# Altium PCB Temp_sense_Project 2.0 - leviathan.PcbDoc (part 3 of 3)
Units mm, origin at the board's own origin, x right, y up, seen from the top; angles counter-clockwise.
Board outline 238.51 x 89.79 mm, 4 copper layers (Top Layer, Layer 1, Layer 2, Bottom Layer), stack 0.603 mm thick; 185 components, 160 nets, 943 pads, 253 vias.
Unrouted connection lines stored in the file: 15.
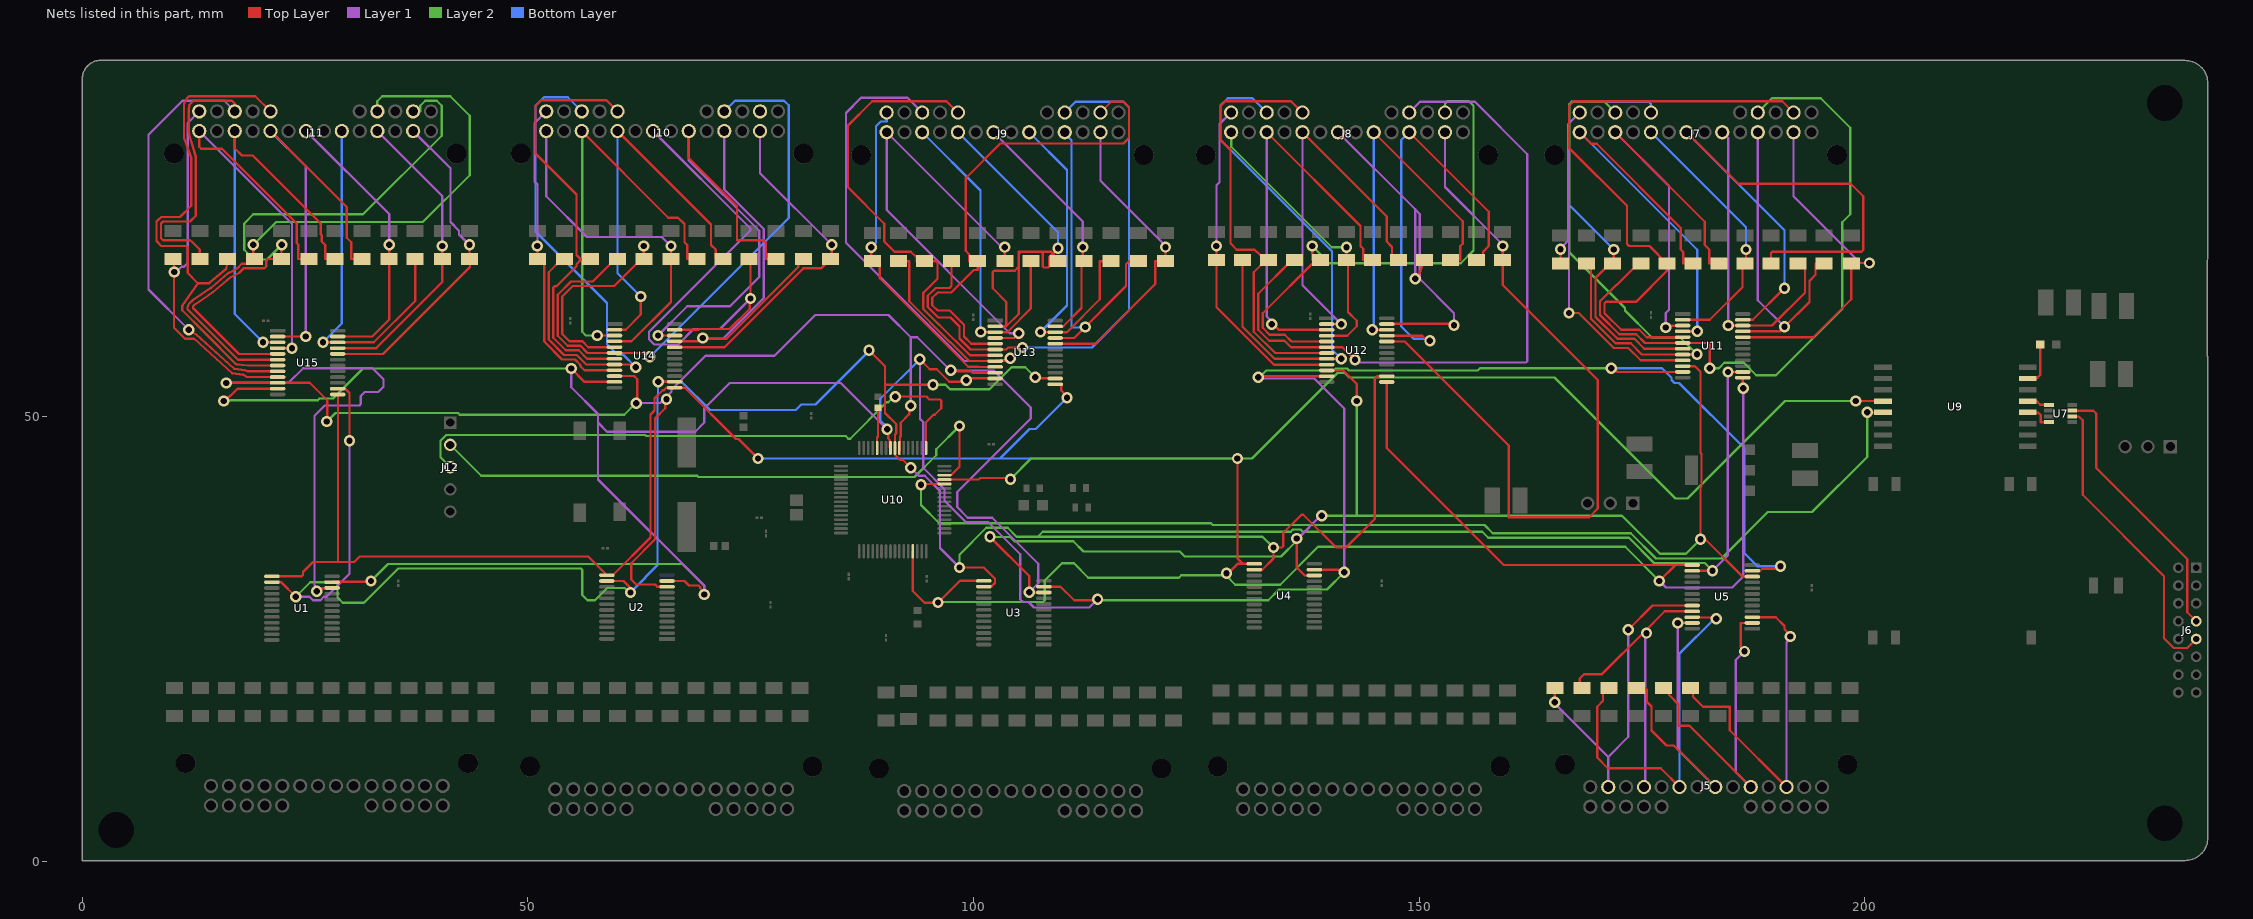
[diagram p5: the nets of this part, all layers, seen from the top]

## Via types
v1: diameter 1.27, hole 0.711, Top Layer to Bottom Layer, 247 vias
v2: diameter 0.711, hole 0.711, Top Layer to Bottom Layer, 6 vias

## Nets (pads, with @x,y where several pads share a name; then routed paths per layer and width w, separated by ;. In a path a pad name is that pad's centre, name@x,y a point inside that pad or via, vN(x,y) a via of type N, cw(c..) or ccw(c..) an arc to the next point about the centre after c; other vN are vias at no path point) (continued)
NetJ5_13: J5.13 R55.2 U5.3 | length 40
  Top Layer w0.254: R55.2@180.467,19.482 180.746,19.482 180.746,18.517 181.864,17.399 184.861,17.399 184.861,14.757 J5.13@191.237,8.382 ; U5.3@187.398,27.443 190.021,27.443 191.008,26.456 191.008,26.075 191.643,25.44 v1(191.643,25.273)
  Layer 1 w0.254: J5.13@191.237,8.382 191.237,24.592 191.643,24.998 v1(191.643,25.273)
NetJ5_15: J5.15 R56.2 U5.2 | length 37.2
  Top Layer w0.254: R56.2@177.419,19.482 178.047,19.482 178.047,18.72 179.121,17.646 179.121,15.265 180.34,15.265 J5.15@187.223,8.382 ; v1(186.512,23.597) 186.08,24.028 186.08,26.793 U5.2@187.398,26.793
  Layer 1 w0.254: v1(186.512,23.597) 185.547,22.631 185.547,10.058 J5.15@187.223,8.382
NetJ5_17: J5.17 R57.2 U5.23 | length 37.6
  Top Layer w0.254: R57.2@174.371,19.482 175.386,19.482 175.577,19.292 175.577,17.916 176.073,17.42 176.073,14.732 177.775,13.03 178.587,13.03 J5.17@183.236,8.382 ; v1(179.019,26.793) U5.23@180.648,26.793
  Layer 1 w0.254: v1(179.019,26.793) 179.019,12.598 J5.17@183.236,8.382
NetJ5_19: J5.19 R58.2 U5.22 | length 42.8
  Top Layer w0.254: R58.2@171.323,19.482 170.637,19.482 170.637,18.059 169.977,17.399 169.977,11.684 171.171,10.49 177.114,10.49 J5.19@179.222,8.382 ; U5.22@180.648,27.443 180.679,27.412 183.188,27.412 v1(183.331,27.269)
  Bottom Layer w0.254: J5.19@179.222,8.382 179.222,23.354 183.138,27.269 v1(183.331,27.269)
NetJ5_21: J5.21 R59.2 U5.21 | length 34.6
  Top Layer w0.254: R59.2@168.275,19.482 168.021,19.736 168.021,20.552 168.518,21.049 170.528,21.049 v1@175.235,25.756 ; v1(175.514,25.654) 175.336,25.654 v1@175.235,25.756 ; U5.21@180.648,28.093 177.572,28.093 v1@175.235,25.756
  Layer 1 w0.254: J5.21@175.235,8.382 175.374,8.522 175.374,25.514 v1(175.514,25.654)
NetJ5_23: J5.23 R60.2 U5.20 | length 37.1
  Top Layer w0.254: v1(165.227,17.898) R60.2@165.227,19.482 ; v1(173.482,26.035) 176.19,28.743 U5.20@180.648,28.743
  Layer 1 w0.254: v1(165.227,17.898) 165.227,17.755 171.221,11.76 ; J5.23@171.221,8.382 171.221,11.76 ; v1(173.482,26.035) 173.482,14.021 171.221,11.76
NetJ6_7: J6.7 U7.7 | length 30.8
  Top Layer w0.254: U7.7@223.296,50.617 225.659,50.617 225.984,50.292 225.984,44.171 236.195,33.96 236.195,27.996 J6.7@237.204,26.987
NetJ6_9: J6.9 U7.6 | length 34.1
  Top Layer w0.254: U7.6@223.296,49.967 224.028,49.967 224.46,49.535 224.46,41.173 233.604,32.029 233.604,25.07 234.696,23.978 236.195,23.978 J6.9@237.204,24.987
NetJ7_1: J7.1 R61.2 U11.9 | length 54.1
  Top Layer w0.254: R61.2@165.862,67.132 v1(165.862,68.716) ; v1(166.827,61.57) 167.919,61.57 171.831,57.658 173.482,57.658 174.879,56.261 U11.9@179.578,56.261
  Layer 1 w0.254: v1(165.862,68.716) 165.862,68.847 166.726,69.71 166.726,82.779 166.827,82.88 ; v1(166.827,61.57) 166.827,82.88 ; J7.1@168.021,84.074 166.827,82.88
NetJ7_3: J7.3 R62.2 U11.8 | length 61.6
  Top Layer w0.254: R62.2@168.783,67.132 169.291,66.624 169.291,60.916 172.041,58.166 173.736,58.166 174.991,56.911 U11.8@179.578,56.911 181.162,56.911 v1(181.183,56.932)
  Layer 2 w0.254: J7.3@172.009,84.074 170.815,85.268 167.132,85.268 166.84,84.976 166.84,76.479 166.878,76.441 166.878,68.358 173.097,62.139 173.097,61.852 176.098,58.852 179.263,58.852 v1(181.183,56.932)
NetJ7_5: J7.5 R63.2 U11.7 | length 48.6
  Top Layer w0.254: v1(171.831,68.707) 171.831,67.209 171.753,67.132 R63.2@171.704,67.132 171.429,67.132 169.799,65.502 169.799,61.127 172.252,58.674 174.161,58.674 175.274,57.561 U11.7@179.578,57.561
  Bottom Layer w0.254: v1(171.831,68.707) 166.827,73.711 166.827,84.963 167.132,85.268 175.768,85.268 176.022,85.014 J7.5@176.022,84.074
NetJ7_7: J7.7 R64.2 U11.6 | length 76.1
  Top Layer w0.254: R64.2@174.879,67.132 174.604,67.132 172.204,64.732 172.156,64.732 170.307,62.883 170.307,61.337 172.462,59.182 174.371,59.182 175.342,58.211 U11.6@179.578,58.211 182.477,58.211 182.626,58.062 v1(182.626,55.372)
  Layer 2 w0.254: v1(182.626,55.372) 182.636,55.382 183.642,55.382 184.237,55.977 186.456,55.977 187.838,54.595 190.057,54.595 197.485,62.023 197.485,71.753 198.374,72.642 198.374,82.372 195.072,85.674 189.611,85.674 J7.7@188.011,84.074
NetJ7_9: J7.9 R65.2 U11.5 | length 69.8
  Top Layer w0.254: U11.5@179.578,58.861 175.536,58.861 174.707,59.69 172.673,59.69 170.815,61.548 170.815,62.673 170.964,62.821 174.327,62.821 177.8,66.294 R65.2@177.8,67.132 175.844,69.088 173.558,69.088 173.317,69.329 173.317,73.596 166.827,80.086 166.827,84.836 167.335,85.344 190.754,85.344 J7.9@192.024,84.074
NetJ7_11: J7.11 R66.2 U11.4 | length 50.4
  Top Layer w0.254: J7.11@168.021,81.864 169.316,80.569 169.926,80.569 179.374,71.121 179.374,68.698 179.642,68.43 179.642,67.132 R66.2@180.721,67.132 ; U11.4@179.578,59.511 v1(181.204,59.512) v1(181.204,59.512)
  Bottom Layer w0.254: J7.11@168.021,81.864 181.204,68.682 v1(181.204,59.512)
NetJ7_13: J7.13 R67.2 U11.3 | length 46.8
  Top Layer w0.254: J7.13@172.009,81.864 182.067,71.806 182.067,69.194 182.563,68.698 182.563,67.132 R67.2@183.642,67.132 ; v1(177.673,59.944) 177.859,60.13 179.547,60.13 U11.3@179.578,60.161
  Layer 1 w0.254: J7.13@172.009,81.864 178.054,75.819 178.054,61.951 177.673,61.57 v1(177.673,59.944)
NetJ7_15: J7.15 R68.2 U11.2 | length 30.5
  Top Layer w0.254: U11.2@179.578,60.811 182.626,60.811 186.284,64.469 R68.2@186.284,67.132 ; R68.2@186.563,67.132 R68.2@186.284,67.132 ; v1(186.69,68.707) 186.69,67.538 R68.2@186.284,67.132
  Bottom Layer w0.254: J7.15@176.022,81.864 186.69,71.196 v1(186.69,68.707)
NetJ7_17: J7.17 R69.2 U11.23 | length 68.7
  Top Layer w0.254: J7.17@180.01,81.864 185.801,76.073 198.45,76.073 199.847,74.676 199.847,68.656 199.644,68.453 189.633,68.453 189.484,68.304 R69.2@189.484,67.132 ; U11.23@186.328,60.811 187.452,60.811 v1(191.008,64.367)
  Bottom Layer w0.254: J7.17@180.01,81.864 191.008,70.866 v1(191.008,64.367)
NetJ7_19: J7.19 R70.2 U11.22 | length 36.1
  Top Layer w0.254: v1(184.683,60.173) 184.695,60.161 U11.22@186.328,60.161 189.599,60.161 193.294,63.856 193.294,67.132 R70.2@192.532,67.132
  Layer 1 w0.254: J7.19@184.023,81.864 184.683,81.204 v1(184.683,60.173)
NetJ7_21: J7.21 R71.2 U11.21 | length 37.5
  Top Layer w0.254: U11.21@186.328,59.511 190.499,59.511 v1(191.008,60.02) 193.802,62.814 193.802,65.176 194.488,65.862 194.488,67.132 R71.2@195.453,67.132
  Layer 1 w0.254: J7.21@188.011,81.864 188.011,63.017 v1(191.008,60.02)
NetJ7_23: J7.23 R72.2 U11.20 | length 38.8
  Top Layer w0.254: U11.20@186.328,58.861 194.243,58.861 198.501,63.119 R72.2@198.501,67.132 198.552,67.183 v1(200.533,67.183)
  Layer 1 w0.254: J7.23@192.024,81.864 192.024,74.676 199.517,67.183 v1(200.533,67.183)
NetJ8_1: J8.1 R73.2 U12.9 | length 37.6
  Top Layer w0.254: v1(127.254,69.097) R73.2@127.254,67.513 127.254,62.23 133.705,55.779 U12.9@139.627,55.779
  Layer 1 w0.254: v1(127.254,69.097) 127.254,75.897 127.61,76.253 127.61,82.779 J8.1@128.905,84.074
NetJ8_3: J8.3 R74.2 U12.8 | length 60.3
  Top Layer w0.254: R74.2@130.175,67.513 130.175,60.035 133.781,56.429 U12.8@139.627,56.429 141.24,56.429 v1(141.249,56.439)
  Bottom Layer w0.254: J8.3@132.893,84.074 131.293,85.674 128.524,85.674 127.711,84.861 127.711,81.026 140.233,68.504 140.233,57.455 v1(141.249,56.439)
NetJ8_5: J8.5 R75.2 U12.7 | length 48.6
  Top Layer w0.254: R75.2@133.096,67.513 R75.2@132.817,67.513 ; J8.5@136.906,84.074 135.636,85.344 128.219,85.344 127.711,84.836 127.711,80.975 128.829,79.858 128.829,69.393 129.54,68.682 131.521,68.682 R75.2@132.817,67.513 ; U12.7@139.627,57.079 133.849,57.079 131.445,59.483 131.445,66.137 132.817,67.509 R75.2@132.817,67.513
NetJ8_7: J8.7 R76.2 U12.6 | length 80.8
  Top Layer w0.254: R76.2@136.017,67.513 135.742,67.513 131.953,63.724 131.953,59.694 133.185,58.462 134.883,58.462 135.616,57.729 U12.6@139.627,57.729 141.407,57.729 v1(142.799,56.337)
  Layer 1 w0.254: v1(142.799,56.337) 143.074,56.337 143.404,56.007 161.979,56.007 162.128,56.156 162.128,79.4 156.261,85.268 150.089,85.268 J8.7@148.895,84.074
NetJ8_9: J8.9 R77.2 U12.5 | length 60.7
  Top Layer w0.254: v1(137.998,69.088) 137.998,67.513 R77.2@138.429,67.513 ; R77.2@138.938,67.513 R77.2@138.429,67.513 ; U12.5@139.627,58.379 135.684,58.379 134.922,59.142 133.224,59.142 132.461,59.904 132.461,61.544 R77.2@138.429,67.513
  Layer 2 w0.254: v1(137.998,69.088) 139.929,67.158 154.686,67.158 156.108,68.58 156.108,84.836 155.6,85.344 153.162,85.344 152.908,85.09 J8.9@152.908,84.074
NetJ8_11: J8.11 R78.2 U12.4 | length 32.5
  Top Layer w0.254: U12.4@139.627,59.029 141.935,59.029 143.002,60.096 143.002,60.706 142.011,61.697 142.011,67.513 R78.2@141.859,67.513 v1(141.859,68.961)
  Layer 2 w0.254: J8.11@128.905,81.864 128.905,80.239 140.183,68.961 v1(141.859,68.961)
NetJ8_13: J8.13 R79.2 U12.3 | length 48.1
  Top Layer w0.254: J8.13@132.893,81.864 143.434,71.323 143.434,69.079 143.739,68.774 143.739,67.513 R79.2@144.78,67.513 ; v1(133.477,60.325) 133.622,60.325 134.268,59.679 U12.3@139.627,59.679
  Layer 1 w0.254: J8.13@132.893,81.864 132.893,61.178 133.477,60.593 v1(133.477,60.325)
NetJ8_15: J8.15 R80.2 U12.2 | length 44.2
  Top Layer w0.254: J8.15@136.906,81.864 146.355,72.415 146.355,69.596 146.964,68.986 146.964,67.513 R80.2@147.701,67.513 ; U12.2@139.627,60.329 v1(141.275,60.329)
  Layer 1 w0.254: J8.15@136.906,81.864 136.906,64.698 v1(141.275,60.329)
NetJ8_17: J8.17 R81.2 U12.23 | length 45
  Top Layer w0.254: U12.23@146.377,60.329 146.408,60.36 153.762,60.36 v1(153.924,60.198) ; v1(149.555,65.405) 149.784,65.405 R81.2@150.622,67.513
  Layer 1 w0.254: J8.17@140.894,81.864 149.555,73.203 ; v1(149.555,65.405) 149.555,73.203 ; v1(153.924,60.198) 153.924,61.544 150.063,65.405 150.063,72.695 149.555,73.203
NetJ8_19: J8.19 R82.2 U12.22 | length 43.6
  Top Layer w0.254: v1(144.729,59.69) 144.74,59.679 U12.22@146.377,59.679 ; J8.19@144.907,81.864 154.889,71.882 154.889,69.346 154.622,69.079 154.622,67.551 154.584,67.513 R82.2@153.543,67.513
  Bottom Layer w0.254: v1(144.729,59.69) 144.907,59.868 J8.19@144.907,81.864
NetJ8_21: J8.21 R83.2 U12.21 | length 50.1
  Top Layer w0.254: U12.21@146.377,59.029 150.358,59.029 150.937,58.45 v1(151.212,58.45) ; J8.21@148.895,81.864 157.81,72.949 157.81,69.079 157.161,68.43 157.161,67.513 R83.2@156.464,67.513
  Bottom Layer w0.254: J8.21@148.895,81.864 148.006,80.975 148.006,60.046 149.377,58.674 150.713,58.674 150.937,58.45 v1(151.212,58.45)
NetJ8_23: J8.23 R84.2 U12.20 | length 86.3
  Top Layer w0.254: U12.20@146.377,58.379 148.387,58.379 160.071,46.695 160.071,38.659 169.088,38.659 170.053,39.624 170.053,54.051 159.385,64.719 R84.2@159.385,67.513 v1(159.385,69.097)
  Layer 1 w0.254: J8.23@152.908,81.864 152.908,75.717 159.385,69.24 v1(159.385,69.097)
NetJ9_1: J9.1 R85.2 U13.9 | length 37.4
  Top Layer w0.254: v1(88.519,68.961) 88.519,67.386 R85.2@88.646,67.386 88.921,67.386 89.472,66.835 89.472,65.475 99.393,55.555 100.518,55.555 100.548,55.525 U13.9@102.416,55.525
  Bottom Layer w0.254: v1(88.519,68.961) 89.052,69.494 89.052,82.525 89.586,83.058 90.246,83.058 J9.1@90.246,84.074
NetJ9_3: J9.3 R86.2 U13.8 | length 68.6
  Top Layer w0.254: R86.2@91.567,67.386 92.773,67.386 92.773,62.893 97.369,58.297 97.409,58.297 99.531,56.175 U13.8@102.416,56.175 102.447,56.206 103.559,56.206 103.859,56.506 v1(104.134,56.506)
  Layer 1 w0.254: J9.3@94.234,84.074 92.583,85.725 87.376,85.725 85.674,84.023 85.674,69.469 98.968,56.175 102.991,56.175 103.127,56.311 103.939,56.311 v1(104.134,56.506)
NetJ9_5: J9.5 R87.2 U13.7 | length 52
  Top Layer w0.254: J9.5@98.247,84.074 96.977,85.344 88.646,85.344 85.903,82.601 85.903,75.692 89.992,71.603 89.992,69.596 91.135,68.453 92.964,68.453 93.599,67.818 93.599,67.386 94.615,67.386 95.809,67.386 95.958,67.237 95.958,65.429 94.361,63.831 94.361,62.023 96.119,60.265 96.159,60.265 99.599,56.825 U13.7@102.416,56.825
NetJ9_7: J9.7 R88.2 U13.6 | length 65.1
  Top Layer w0.254: R88.2@97.536,67.386 97.536,64.625 97.3,64.389 95.762,64.389 94.869,63.496 94.869,62.234 96.041,61.062 97.409,61.062 98.425,60.046 98.425,58.718 99.668,57.475 U13.6@102.416,57.475 103.666,57.475 103.9,57.709 v1(105.486,57.709)
  Bottom Layer w0.254: v1(105.486,57.709) 113.284,57.709 117.45,61.874 117.45,84.658 116.84,85.268 111.43,85.268 J9.7@110.236,84.074
NetJ9_9: J9.9 R89.2 U13.5 | length 55.8
  Top Layer w0.254: U13.5@102.416,58.125 99.736,58.125 98.933,58.928 98.933,60.256 97.34,61.849 95.972,61.849 95.377,62.444 95.377,63.286 95.972,63.881 97.511,63.881 97.917,64.287 100.025,66.396 100.457,66.396 R89.2@100.457,67.386 99.517,67.386 99.517,68.148 99.111,68.555 99.111,76.708 102.997,80.594 116.84,80.594 117.45,81.204 117.45,84.658 116.84,85.268 115.443,85.268 J9.9@114.249,84.074
NetJ9_11: J9.11 R90.2 U13.4 | length 52.4
  Top Layer w0.254: U13.4@102.416,58.775 104.571,58.775 v1(105.08,59.284) ; R90.2@103.505,67.386 v1(103.505,68.97)
  Layer 1 w0.254: v1(103.505,68.97) 103.311,69.164 102.946,69.164 J9.11@90.246,81.864 90.246,73.121 104.064,59.303 105.06,59.303 v1(105.08,59.284)
NetJ9_13: J9.13 R91.2 U13.3 | length 37.2
  Top Layer w0.254: v1(100.823,59.444) 100.832,59.434 102.407,59.434 U13.3@102.416,59.425 103.783,59.425 106.426,62.068 R91.2@106.426,67.386
  Bottom Layer w0.254: J9.13@94.234,81.864 100.787,75.311 100.787,59.479 v1(100.823,59.444)
NetJ9_15: J9.15 R92.2 U13.2 | length 52.1
  Top Layer w0.254: U13.2@102.416,60.075 103.611,60.075 ; R92.2@109.474,67.386 108.991,67.386 108.991,68.174 108.712,68.453 105.08,68.453 105.08,61.472 103.683,60.075 103.611,60.075 ; v1(109.474,68.834) 108.506,67.866 108.506,66.825 108.357,66.677 107.909,66.677 107.76,66.825 107.76,68.221 107.537,68.444 105.315,68.444 105.092,68.221 105.092,66.803 104.616,66.327 102.308,66.327 102.159,66.178 102.159,64.338 103.683,62.814 103.683,60.147 103.611,60.075
  Bottom Layer w0.254: J9.15@98.247,81.864 109.474,70.637 v1(109.474,68.834)
NetJ9_17: J9.17 R93.2 U13.23 | length 28
  Top Layer w0.254: U13.23@109.166,60.075 110.062,60.075 112.116,62.128 112.116,67.386 R93.2@112.395,67.386 112.268,67.513 v1(112.268,68.97)
  Layer 1 w0.254: J9.17@102.235,81.864 112.268,71.831 v1(112.268,68.97)
NetJ9_19: J9.19 R94.2 U13.22 | length 39.1
  Top Layer w0.254: v1(107.518,59.436) 107.529,59.425 U13.22@109.166,59.425 110.479,59.425 114.173,63.119 114.173,67.386 R94.2@115.443,67.386
  Bottom Layer w0.254: J9.19@106.248,81.864 110.49,77.622 110.49,62.408 v1(107.518,59.436)
NetJ9_21: J9.21 R95.2 U13.21 | length 38
  Top Layer w0.254: U13.21@109.166,58.775 111.302,58.775 117.119,64.592 117.119,67.056 117.449,67.386 R95.2@118.491,67.386
  Bottom Layer w0.254: J9.21@110.236,81.864 110.236,81.718 110.998,80.956 110.998,60.096 111.147,59.948 112.475,59.948 v1(112.529,60.002)
NetJ9_23: J9.23 R96.2 U13.20 | length 35.2
  Top Layer w0.254: U13.20@109.166,58.125 113.7,58.125 120.396,64.821 120.396,67.386 R96.2@121.539,67.386 v1(121.539,68.97)
  Layer 1 w0.254: J9.23@114.249,81.864 114.249,76.403 121.539,69.113 v1(121.539,68.97)
NetJ10_1: J10.1 R97.2 U14.9 | length 36
  Top Layer w0.254: v1(51.054,69.088) R97.2@51.054,67.64 51.265,67.64 51.816,67.089 51.816,58.376 53.827,56.365 55.262,56.365 55.857,55.77 55.857,55.618 56.331,55.144 U14.9@59.49,55.144
  Layer 1 w0.254: v1(51.054,69.088) 51.054,75.982 50.749,76.287 50.749,82.906 J10.1@52.045,84.201
NetJ10_3: J10.3 R98.2 U14.8 | length 61.6
  Top Layer w0.254: R98.2@54.102,67.64 53.827,67.64 52.324,66.137 52.324,58.587 54.038,56.873 55.472,56.873 56.551,55.794 U14.8@59.703,55.794 61.533,55.794 61.828,55.499 v1(62.103,55.499)
  Bottom Layer w0.254: J10.3@56.032,84.201 54.458,85.776 51.791,85.776 50.851,84.836 50.851,70.728 58.877,62.702 58.877,58.055 60.058,56.874 60.728,56.874 v1(62.103,55.499)
NetJ10_5: J10.5 R99.2 U14.7 | length 48.3
  Top Layer w0.254: R99.2@57.023,67.64 56.032,67.64 ; U14.7@59.49,56.444 56.62,56.444 55.683,57.381 54.248,57.381 52.832,58.797 52.832,64.414 52.981,64.563 53.195,64.563 55.448,66.816 55.448,67.056 55.956,67.564 56.032,67.64 ; J10.5@60.046,84.201 58.801,85.446 51.46,85.446 50.851,84.836 50.851,79.477 55.448,74.879 55.448,68.071 55.88,67.64 56.032,67.64
NetJ10_7: J10.7 R100.2 U14.6 | length 66.9
  Top Layer w0.254: R100.2@60.071,67.64 59.796,67.64 57.258,65.102 54.819,65.102 53.34,63.623 53.34,59.008 54.459,57.889 55.893,57.889 56.688,57.094 U14.6@59.703,57.094 62.971,57.094 63.403,56.662 v1(63.678,56.662)
  Bottom Layer w0.254: v1(63.678,56.662) 79.248,72.232 79.248,84.887 78.74,85.395 73.228,85.395 J10.7@72.034,84.201
NetJ10_9: J10.9 R101.2 U14.5 | length 22.8
  Top Layer w0.254: U14.5@59.49,57.744 56.757,57.744 56.104,58.397 54.669,58.397 53.848,59.218 53.848,63.413 55.029,64.594 59.671,64.594 62.717,67.64 R101.2@62.992,67.64 v1(62.992,69.088)
NetJ10_11: J10.11 R102.2 U14.4 | length 38.3
  Top Layer w0.254: U14.4@59.49,58.394 U14.4@59.703,58.394 61.62,58.394 66.04,62.814 R102.2@66.04,67.64 v1(66.04,69.088)
  Layer 1 w0.254: J10.11@52.045,81.991 52.045,74.67 56.61,70.104 65.024,70.104 v1(66.04,69.088)
NetJ10_13: J10.13 R103.2 U14.3 | length 47.1
  Top Layer w0.254: J10.13@56.032,81.991 65.748,72.276 66.84,72.276 67.564,71.552 67.564,69.524 67.882,69.206 67.882,67.64 R103.2@68.961,67.64 ; v1(57.785,59.055) 57.791,59.05 59.484,59.05 U14.3@59.49,59.044
  Layer 2 w0.254: J10.13@56.032,81.991 56.085,81.939 56.085,59.465 56.495,59.055 v1(57.785,59.055)
NetJ10_15: J10.15 R104.2 U14.2 | length 45.3
  Top Layer w0.254: U14.2@59.49,59.694 U14.2@59.703,59.694 60.96,59.694 62.662,61.396 v1(62.662,63.424) ; J10.15@60.046,81.991 70.536,71.501 70.536,69.206 71.056,68.686 71.056,67.64 R104.2@71.882,67.64
  Bottom Layer w0.254: J10.15@60.046,81.991 60.046,66.04 v1(62.662,63.424)
NetJ10_17: J10.17 R105.2 U14.23 | length 61.4
  Top Layer w0.254: U14.23@66.454,59.694 69.093,59.694 69.175,59.776 72.603,59.776 74.89,62.063 74.89,63.126 v1(74.97,63.206) ; R105.2@74.803,67.64 74.97,67.473 74.97,63.246 v1@74.95,63.226
  Layer 1 w0.254: J10.17@64.033,81.991 74.93,71.095 74.93,70.83 63.576,59.476 63.576,58.634 64.171,58.039 66.85,58.039 68.587,59.776 71.54,59.776 v1(74.97,63.206)
NetJ10_19: J10.19 R106.2 U14.22 | length 56.2
  Top Layer w0.254: v1(64.592,59.055) 64.603,59.044 U14.22@66.24,59.044 ; J10.19@68.047,81.991 68.047,78.969 73.457,73.558 73.457,69.723 76.456,69.723 76.708,69.471 76.708,67.64 R106.2@77.851,67.64
  Layer 1 w0.254: v1(64.592,59.055) 67.869,62.332 72.658,62.332 75.946,65.619 75.946,70.797 68.047,78.696 J10.19@68.047,81.991
NetJ10_21: J10.21 R107.2 U14.21 | length 47.9
  Top Layer w0.254: U14.21@66.454,58.394 69.041,58.394 69.407,58.76 v1(69.596,58.76) ; v1@69.596,58.674 72.263,58.674 80.319,66.73 80.319,67.089 80.869,67.64 R107.2@80.899,67.64
  Layer 1 w0.254: v1(69.596,58.76) 69.682,58.674 71.875,58.674 76.454,63.253 76.454,71.007 72.034,75.427 J10.21@72.034,81.991
NetJ10_23: J10.23 R108.2 U14.20 | length 39.3
  Top Layer w0.254: U14.20@66.454,57.744 72.051,57.744 80.888,66.581 82.888,66.581 R108.2@83.947,67.64 84.074,67.767 v1(84.074,69.224)
  Layer 1 w0.254: J10.23@76.048,81.991 76.048,77.267 84.074,69.24 v1(84.074,69.224)
NetJ11_1: J11.1 R109.2 U15.9 | length 40.9
  Top Layer w0.254: R109.2@10.16,67.64 10.287,67.089 v1(10.287,66.167) 10.287,59.904 10.361,59.83 11.517,58.674 12.531,58.674 16.826,54.808 18.024,54.651 18.451,54.382 U15.9@21.898,54.382
  Layer 1 w0.254: v1(10.287,66.167) 10.513,66.167 11.119,66.772 11.4,66.772 11.811,67.183 11.811,82.906 J11.1@13.106,84.201
NetJ11_3: J11.3 R110.2 U15.8 | length 77.9
  Top Layer w0.254: v1(11.938,59.69) 12.742,59.182 17.036,55.316 18.251,55.155 18.519,55.032 U15.8@21.898,55.032 ; R110.2@13.208,67.64 13.159,67.64 13.159,68.71 12.326,69.542 12.261,69.596 12.073,69.732 9.049,69.732 8.826,69.955 8.826,71.626 9.049,71.849 12.097,71.849 12.246,71.998 12.722,72.474 12.722,79.128 11.974,81.656 cw(c13.106,81.991) 11.938,81.819 cw(c13.106,81.991) 11.925,81.991 11.925,84.201 cw(c13.106,84.201) 11.931,84.312 11.931,84.314 11.987,84.91 12.471,85.395 16.789,85.395 17.094,85.09 J11.3@17.094,84.201
  Layer 1 w0.254: v1(11.938,59.69) 7.417,64.211 7.417,81.585 11.227,85.395 15.9,85.395 J11.3@17.094,84.201
NetJ11_5: J11.5 R111.2 U15.7 | length 59.3
  Top Layer w0.254: R111.2@16.256,67.64 16.214,67.089 16.176,66.598 16.103,66.525 14.303,64.983 14.232,64.922 12.954,64.922 ; J11.5@21.107,84.201 19.406,85.903 11.96,85.903 11.811,85.754 11.405,85.046 11.405,81.232 12.21,79.038 12.21,73.607 10.96,72.357 8.839,72.357 8.318,71.836 8.318,70.802 8.306,70.79 8.306,69.64 8.857,69.088 11.662,69.088 11.811,68.939 11.811,66.065 12.954,64.922 ; U15.7@21.898,55.682 18.526,55.682 17.247,55.824 13.635,59.435 11.2,61.871 11.2,62.383 11.245,62.448 12.954,64.922
NetJ11_7: J11.7 R112.2 U15.6 | length 70.6
  Top Layer w0.254: R112.2@19.177,67.64 v1(19.177,69.215) ; R112.2@19.304,67.64 18.478,67.089 17.875,67.089 17.367,66.581 16.412,66.078 16.327,66.032 14.442,64.414 12.339,62.98 11.986,62.627 11.91,62.518 11.799,62.2 11.799,61.99 17.457,56.332 U15.6@21.898,56.332
  Layer 2 w0.254: v1(19.177,69.215) 21.742,71.78 38.202,71.78 43.459,77.038 43.459,83.718 41.288,85.89 33.642,85.89 33.096,85.344 J11.7@33.096,84.201
NetJ11_9: J11.9 R113.2 U15.5 | length 67.8
  Top Layer w0.254: U15.5@21.898,56.982 17.567,56.982 12.475,62.074 12.418,62.131 12.418,62.341 12.567,62.49 14.157,63.567 14.631,63.906 16.57,65.55 16.594,65.57 17.577,66.073 18.085,66.581 20.415,66.581 20.638,66.804 20.638,67.491 20.787,67.64 R113.2@22.352,67.64 v1(22.352,69.215)
  Layer 2 w0.254: v1(22.352,69.215) 20.701,67.564 19.279,67.564 18.161,68.682 18.161,71.628 19.177,72.644 31.496,72.644 40.31,81.458 40.31,84.836 39.764,85.382 38.468,85.382 37.922,84.836 37.922,84.201 J11.9@37.109,84.201
NetJ11_11: J11.11 R114.2 U15.4 | length 51.8
  Top Layer w0.254: J11.11@13.106,81.991 13.106,80.239 13.335,80.01 15.672,80.01 24.054,71.628 24.054,69.418 24.206,69.266 24.206,67.64 R114.2@25.4,67.64 ; U15.4@21.898,57.632 v1(23.52,57.633)
  Layer 1 w0.254: J11.11@13.106,81.991 23.52,71.577 v1(23.52,57.633)
NetJ11_13: J11.13 R115.2 U15.3 | length 47
  Top Layer w0.254: J11.13@17.094,81.991 17.094,80.061 17.907,79.248 19.112,79.248 26.734,71.626 26.734,70.421 26.848,70.307 26.848,69.6 27.242,69.206 27.242,67.64 R115.2@28.321,67.64 ; v1(20.27,58.282) U15.3@21.898,58.282
  Bottom Layer w0.254: J11.13@17.094,81.991 17.094,61.457 v1(20.27,58.282)
NetJ11_15: J11.15 R116.2 U15.2 | length 47.2
  Top Layer w0.254: J11.15@21.107,81.991 21.133,81.991 29.667,73.457 29.667,70.01 30.163,69.514 30.163,67.64 R116.2@31.369,67.64 ; U15.2@21.898,58.932 v1(25.07,58.932)
  Layer 1 w0.254: J11.15@21.107,81.991 25.07,78.029 v1(25.07,58.932)
NetJ11_17: J11.17 R117.2 U15.23 | length 31.6
  Top Layer w0.254: U15.23@28.648,58.932 32.516,58.932 34.417,60.833 R117.2@34.417,67.64 v1(34.417,69.224)
  Layer 1 w0.254: J11.17@25.095,81.991 34.417,72.669 v1(34.417,69.224)
NetJ11_19: J11.19 R118.2 U15.22 | length 41.6
  Top Layer w0.254: v1(27,58.293) 27.011,58.282 32.704,58.282 37.338,62.916 R118.2@37.338,67.64
  Bottom Layer w0.254: v1(27,58.293) 29.108,60.401 J11.19@29.108,81.991
NetJ11_21: J11.21 R119.2 U15.21 | length 34.8
  Top Layer w0.254: U15.21@28.648,57.632 32.969,57.632 40.386,65.049 R119.2@40.386,67.64 v1(40.386,69.088)
  Layer 1 w0.254: J11.21@33.096,81.991 40.386,74.701 v1(40.386,69.088)
NetJ11_23: J11.23 R120.2 U15.20 | length 36.8
  Top Layer w0.254: U15.20@28.648,56.982 33.741,56.982 43.489,66.73 43.489,67.585 R120.2@43.434,67.64 v1(43.434,69.215)
  Layer 1 w0.254: J11.23@37.109,81.991 41.292,77.808 41.292,71.788 42.266,70.815 42.266,70.383 v1(43.434,69.215)
NetJ12_2: J12.2 U10.46 | length 68.1
  Top Layer w0.254: U10.46@96.726,43.384 96.735,43.393 97.489,43.393 98.425,44.329 v1(98.425,48.895)
  Layer 2 w0.254: J12.2@41.275,46.783 44.751,43.307 69.004,43.307 69.131,43.18 93.385,43.18 95.808,45.603 95.808,46.278 v1(98.425,48.895)
NetJ12_3: J12.3 U10.49 | length 68.3
  Top Layer w0.254: v1(91.218,52.19) 91.226,52.197 94.714,52.197 95.033,51.877 96.227,51.877 96.375,51.729 96.375,50.887 95.636,50.148 95.504,50.148 94.676,49.321 U10.49@94.676,46.434
  Layer 2 w0.254: J12.3@41.275,44.283 40.183,45.375 40.183,47.244 40.818,47.879 63.172,47.879 63.292,47.759 85.645,47.759 85.945,47.46 86.155,47.46 90.243,51.548 90.423,51.548 91.064,52.19 v1(91.218,52.19)
NetR121_2: R121.2 U10.60 | length 4.5
  Top Layer w0.254: U10.60@89.176,46.434 89.176,47.607 89.281,47.712 R121.2@89.281,50.936
NetR124_1: R124.1 U9.7 | length 5
  Top Layer w0.254: U9.7@218.307,54.229 219.318,54.229 219.699,54.61 R124.1@219.699,58.039
NetU1_10: U1.10 U2.10 U3.10 U4.10 U5.10 U10.55 U11.10 U12.10 U13.10 U14.10 U15.10 | length 382.7
  Top Layer w0.254: v1(16.129,53.721) 16.14,53.732 U15.10@21.898,53.732 25.516,53.732 27.466,51.782 27.466,49.437 v1(27.432,49.403) ; v1(26.284,30.353) 26.559,30.353 26.898,30.692 27.982,30.692 U1.10@28.013,30.723 ; U14.10@59.49,54.494 U14.10@59.703,54.494 61.905,54.494 62.264,54.136 62.264,51.57 v1(62.154,51.46) ; v1(65.55,51.899) 65.412,51.761 65.412,50.883 64.262,49.733 64.262,36.181 61.581,33.501 61.581,31.667 62.144,31.104 64.262,31.104 64.516,30.85 U2.10@65.605,30.85 ; U10.55@91.749,46.12 91.749,47.652 91.821,47.723 91.821,49.255 92.77,50.204 92.77,50.987 v1(92.964,51.181) ; v1(97.43,55.139) 97.522,55.047 99.7,55.047 99.872,54.875 U13.10@102.416,54.875 ; v1(101.854,36.449) 106.248,32.055 v1(106.248,30.226) U3.10@107.896,30.215 ; v1(136.271,36.271) v1@136.398,36.144 ; v1@136.398,36.271 v1@136.398,36.144 ; U4.10@138.249,32.12 137.16,32.12 136.271,33.009 136.271,36.017 v1@136.398,36.144 ; v1@138.938,38.811 v1(139.065,38.811) ; U12.10@139.627,55.129 141.489,55.129 143.002,53.616 v1(143.002,51.689) ; U11.10@179.578,55.611 180.95,55.611 181.57,54.991 181.57,45.88 181.7,45.75 181.7,42.134 181.57,42.004 v1(181.57,36.173) 182.114,36.173 186.294,31.993 U5.10@187.398,31.993
  Layer 1 w0.254: v1(16.129,53.721) 16.14,53.732 23.129,53.732 24.769,55.372 31.242,55.372 31.621,55.372 32.552,55.372 33.782,54.142 33.782,53.3 33.187,52.705 31.688,52.705 31.242,52.259 31.242,51.352 31.093,51.203 27.2,51.203 26.035,50.038 26.035,31.01 26.09,30.955 26.09,30.547 v1(26.284,30.353) ; v1(62.154,51.46) 64.836,51.46 65.303,51.928 v1@65.303,52.146 ; v1(65.55,51.899) v1@65.303,52.146 ; v1(92.964,51.181) 92.964,58.841 ; v1@97.43,55.118 102.275,55.118 106.426,50.967 106.426,49.737 98.171,41.482 98.171,39.798 99.361,38.608 102.097,38.608 107.264,33.441 107.264,31.242 v1(106.248,30.226) ; v1(97.43,55.139) 97.388,55.139 93.686,58.841 92.964,58.841 ; v1@136.398,36.271 v1@138.938,38.811 ; v1@65.303,52.146 65.522,52.146 66.112,52.736 66.112,52.954 69.926,56.769 77.655,56.769 82.227,61.341 90.464,61.341 92.964,58.841
  Layer 2 w0.254: v1(27.432,49.403) 28.393,50.364 42.133,50.364 42.332,50.165 60.811,50.165 62.107,51.46 v1(62.154,51.46) ; v1(101.854,36.449) 104.126,36.449 104.608,35.966 111.178,35.966 112.347,34.798 123.14,34.798 123.699,34.239 134.493,34.239 136.271,36.017 v1(136.271,36.271) ; v1(139.065,38.811) 143.002,38.811 ; v1(143.002,51.689) 143.002,38.811 ; v1(181.57,36.173) 179.941,34.544 177.038,34.544 172.771,38.811 143.002,38.811
NetU1_11: U1.11 U2.11 U3.11 U4.11 U5.11 U10.57 U11.11 U12.11 U13.11 U14.11 U15.11 | length 399.5
  Top Layer w0.254: v1(15.875,51.689) 16.002,51.689 17.395,53.082 U15.11@21.898,53.082 ; U1.11@28.013,31.373 28.044,31.404 32.293,31.404 v1(32.385,31.496) ; v1(54.841,55.349) 56.346,53.844 U14.11@59.49,53.844 ; U2.11@65.605,31.5 67.56,31.5 68.072,30.988 69.16,30.988 69.339,30.808 69.339,30.695 69.774,30.261 v1(69.774,29.986) ; v1(90.297,48.514) 90.414,48.397 90.414,47.498 90.603,47.309 90.603,46.482 U10.57@90.676,46.434 ; v1(93.98,56.388) 95.093,55.275 95.857,55.275 97.273,53.859 99.015,53.859 v1(99.187,54.031) ; v1@99.187,54.156 99.287,54.256 102.385,54.256 U13.11@102.416,54.225 ; U3.11@107.896,30.865 109.759,30.865 111.287,29.337 113.792,29.337 v1(113.919,29.464) ; v1(131.953,54.356) 132.076,54.479 U12.11@139.627,54.479 ; U4.11@138.249,32.77 141.322,32.77 v1(141.605,32.487) ; v1(171.577,55.372) 171.852,55.372 172.263,54.961 U11.11@179.578,54.961 ; U5.11@187.398,32.643 188.294,32.643 188.519,32.868 190.267,32.868 v1(190.551,33.151)
  Layer 1 w0.254: v1(54.841,55.349) 54.841,53.25 57.861,50.23 57.861,49.276 ; v1(69.774,29.986) 69.774,30.988 57.861,42.901 57.861,49.276 ; v1(90.297,48.514) 85.09,53.721 72.644,53.721 69.774,50.851 69.774,49.276 68.758,48.26 58.877,48.26 57.861,49.276 ; v1(93.98,56.388) 93.98,49.692 94.343,49.329 94.343,44.21 96.747,41.806 96.747,40.504 99.151,38.1 101.64,38.1 105.232,34.508 105.232,29.464 105.55,29.146 106.172,29.146 106.794,28.524 112.979,28.524 v1(113.919,29.464) ; v1(131.953,54.356) 132.08,54.229 138.238,54.229 141.605,50.862 v1(141.605,32.487)
  Layer 2 w0.254: v1(15.875,51.689) 15.977,51.791 26.416,51.791 26.594,51.968 28.118,51.968 31.498,55.349 v1(54.841,55.349) ; v1(32.385,31.496) 34.29,33.401 67.361,33.401 69.774,30.988 v1(69.774,29.986) ; v1(113.919,29.464) 114.046,29.337 133.071,29.337 134.27,30.536 139.654,30.536 v1(141.605,32.487) ; v1(131.953,54.356) 132.08,54.356 132.842,55.118 140.399,55.118 140.634,55.353 141.896,55.353 142.131,55.118 156.59,55.118 156.844,55.372 v1(171.577,55.372)
  Bottom Layer w0.254: v1(90.297,48.514) 90.297,48.789 89.535,49.551 89.535,51.943 v1(93.98,56.388) ; v1(171.577,55.372) 177.254,55.372 178.321,54.305 178.321,54.067 178.665,53.723 179.178,53.723 186.508,46.392 186.508,34.603 187.96,33.151 v1(190.551,33.151)
NetU1_13: U1.13 U2.13 U3.13 U4.13 U5.13 U10.29 U11.13 U12.13 U13.13 U14.13 U15.13 | length 363.6
  Top Layer w0.254: U1.13@21.263,32.023 24.611,32.023 24.76,32.172 24.76,32.514 25.873,33.627 28.677,33.627 ; U15.13@28.648,52.432 28.648,52.386 28.677,52.358 28.677,33.627 ; v1(75.819,45.237) 73.617,47.439 73.35,47.439 67.595,53.194 U14.13@66.454,53.194 65.528,53.194 65.249,52.915 65.129,52.915 64.186,51.972 64.186,50.622 63.754,50.19 63.754,36.392 59.512,32.15 U2.13@58.855,32.15 56.766,34.239 31.115,34.239 30.503,33.627 28.677,33.627 ; U10.29@93.176,34.834 93.176,30.369 94.488,29.058 95.987,29.058 v1(96.012,29.083) 96.044,29.083 98.476,31.515 U3.13@101.146,31.515 ; U13.13@109.166,53.575 109.774,53.575 109.848,53.501 109.848,52.865 110.49,52.224 v1(110.49,52.07) ; v1(128.379,32.351) 128.541,32.351 129.61,33.42 130.226,33.42 ; 129.61,45.237 129.61,34.036 130.226,33.42 ; U4.13@131.499,33.42 130.226,33.42 ; U12.13@146.377,53.829 146.355,53.829 146.355,46.431 159.493,33.293 178.759,33.293 ; v1(176.962,31.496) 178.759,33.293 ; U5.13@180.648,33.293 178.759,33.293 ; U11.13@186.328,54.311 186.328,53.194 v1(186.385,53.137)
  Layer 1 w0.254: v1(176.962,31.496) 177.698,30.759 185.141,30.759 186.385,32.004 v1(186.385,53.137)
  Layer 2 w0.254: v1(96.012,29.083) 96.063,29.134 107.801,29.134 108.001,29.333 108.001,31.551 109.927,33.477 111.263,33.477 112.863,31.877 123.046,31.877 123.3,32.131 v1@128.321,32.131 ; v1(128.379,32.351) 128.379,32.19 v1@128.321,32.131 ; v1@176.974,31.484 v1(176.962,31.496) 173.126,35.331 138.666,35.331 134.424,31.09 129.362,31.09 v1@128.321,32.131
  Bottom Layer w0.254: v1(75.819,45.237) 102.965,45.237 ; v1(110.49,52.07) 106.977,48.557 106.284,48.557 102.965,45.237 ; 129.61,45.237 102.965,45.237
NetU1_14: U1.14 U2.14 U3.14 U4.14 U5.14 U10.56 U11.14 U12.14 U13.14 U14.14 U15.14 | length 374.2
  Top Layer w0.254: U1.14@21.263,31.373 22.272,31.373 v1(23.927,29.718) ; U15.14@28.648,53.082 28.679,53.051 29.53,53.051 29.972,52.609 v1(29.972,47.244) ; U2.14@58.855,31.5 60.717,31.5 61.509,30.708 v1(61.509,30.2) ; v1(64.602,53.844) U14.14@66.24,53.844 ; v1(88.265,57.404) 90.068,55.601 90.068,53.529 ; v1(92.964,44.196) 92.06,45.1 91.757,45.1 91.185,45.671 91.185,46.425 U10.56@91.176,46.434 91.176,47.952 91.313,48.088 91.313,49.107 90.068,50.352 90.068,53.529 ; v1(95.454,53.523) 90.075,53.523 90.068,53.529 ; v1(98.425,33.02) 101.142,33.02 102.403,31.759 102.403,31.271 102.028,30.896 101.177,30.896 U3.14@101.146,30.865 ; v1(106.934,54.356) 107.034,54.256 109.135,54.256 U13.14@109.166,54.225 ; U4.14@131.499,32.77 132.389,32.77 133.655,34.036 v1(133.655,35.255) 134.598,35.255 134.747,35.404 134.747,36.902 136.792,38.947 137.002,38.947 140.694,35.255 141.808,35.255 145.009,38.456 145.009,54.2 145.288,54.479 U12.14@146.377,54.479 ; U5.14@180.648,32.643 v1(182.926,32.643) ; v1(184.658,54.961) U11.14@186.328,54.961
  Layer 1 w0.254: v1(23.927,29.718) 25.482,29.718 25.863,29.337 26.705,29.337 27.086,29.718 27.381,29.718 29.972,32.309 v1(29.972,47.244) ; v1(92.964,44.196) 93.853,43.307 94.528,43.307 96.239,41.596 96.239,35.206 v1(98.425,33.02) ; v1(182.926,32.643) 184.633,34.35 184.633,54.936 v1(184.658,54.961)
  Layer 2 w0.254: v1(23.927,29.718) 25.578,31.369 28.478,31.369 28.626,31.22 28.626,29.652 29.222,29.057 31.596,29.057 35.432,32.893 55.935,32.893 56.084,32.744 56.084,29.932 56.679,29.337 57.521,29.337 58.893,30.709 60.852,30.709 61.361,30.2 v1(61.509,30.2) ; v1(95.454,53.523) 96.845,53.523 97.353,53.015 101.783,53.015 102.387,53.619 102.391,53.619 104.271,55.499 105.791,55.499 v1(106.934,54.356) ; v1(98.425,33.02) 98.425,34.457 101.433,37.465 103.828,37.465 104.819,36.474 107.213,36.474 ; v1(133.655,35.255) 132.436,36.474 107.213,36.474 ; v1(182.926,32.643) 182.041,33.528 176.367,33.528 173.547,36.347 157.759,36.347 157.074,37.033 136.946,37.033 136.692,37.287 135.85,37.287 135.596,37.033 107.772,37.033 107.213,36.474
  Bottom Layer w0.254: v1(61.509,30.2) 63.188,31.878 63.188,31.952 64.534,33.299 64.534,52.32 64.602,52.388 v1(64.602,53.844) 67.263,53.844 70.412,50.695 80.044,50.695 80.657,51.308 82.26,51.308 88.265,57.313 v1(88.265,57.404)
NetU7_1: U7.1 U9.5 | length 2.6
  Top Layer w0.254: U9.5@218.307,51.689 219.278,51.689 219.7,51.267 U7.1@220.696,51.267
NetU7_4: U7.4 U9.4 | length 3.3
  Top Layer w0.254: U9.4@218.307,50.419 219.456,50.419 219.761,50.114 219.761,49.317 U7.4@220.696,49.317
NetU9_12: U9.12 U10.45 | length 120.3
  Top Layer w0.254: U10.45@97.155,42.885 100.577,42.885 100.745,43.053 104.013,43.053 v1(104.14,42.926) ; v1(199.009,51.689) U9.12@202.057,51.689
  Layer 2 w0.254: v1(104.14,42.926) 106.451,45.237 v1(129.61,45.237) 131.237,45.237 140.844,54.845 141.686,54.845 142.194,54.337 165.206,54.337 178.776,40.767 180.126,40.767 191.048,51.689 v1(199.009,51.689)
NetU9_13: U9.13 U10.44 | length 125
  Top Layer w0.254: v1(94.107,42.291) 94.191,42.375 96.718,42.375 U10.44@96.726,42.384 ; v1(200.304,50.419) U9.13@202.057,50.419
  Layer 2 w0.254: v1(94.107,42.291) 94.107,40.03 96.164,37.973 126.657,37.973 126.835,37.795 157.328,37.795 158.267,36.855 173.758,36.855 176.577,34.036 183.921,34.036 189.128,39.243 194.096,39.243 200.304,45.452 v1(200.304,50.419)
pads on no net: C1.2 C2.2 C10. C13.1 C14.2 C15.1 C16.2 C17.2 C18.2 C19.1 C20.2 C21.2 C22.1 C23.2 C24.2 C25.2 C26.2 J1. J2. J3. J4. J5. J6.2 J6.3 J6.4 J6.5 J6.6 J6.8 J6.10 J6.11 J6.12 J6.13 J6.14 J6.15 J6.16 J7. J8. J9. J10. J11. J12.4 PS1.2 PS2.2 R121.1 SW1.3 SW1.4 U1.16 U1.17 U1.18 U1.19 U2.16 U2.17 U2.18 U2.19 U3.16 U3.17 U3.18 U3.19 U4.16 U4.17 U4.18 U4.19 U5.16 U5.17 U5.18 U5.19 U6.1 U6.2 U6.7 U6.8 U6.10 U7.2 U7.8 U9.2 U9.3 U9.6 U9.8 U9.9 U9.11 U9.14 U9.15 U10.2 U10.3 U10.4 U10.10 U10.11 U10.12 U10.18 U10.24 U10.25 U10.26 U10.27 U10.28 U10.31 U10.33 U10.34 U10.35 U10.36 U10.37 U10.38 U10.41 U10.42 U10.43 U10.47 U10.50 U10.51 U10.52 U10.53 U10.54 U10.58 U10.59 U10.61 U10.62 U10.63 U11.16 U11.17 U11.18 U11.19 U12.16 U12.17 U12.18 U12.19 U13.16 U13.17 U13.18 U13.19 U14.16 U14.17 U14.18 U14.19 U15.16 U15.17 U15.18 U15.19 U16.1 U16.2
copper on no net: | length 1.1
  Top Layer w0.254: v2(99.822,62.484) 99.822,61.517 99.949,61.39

## Polygon pours and split planes (outlines as drawn)
GND on Bottom Layer "GND_L04_P005" (solid, remove dead copper, pour order 5): 6.337,84.528 6.337,7.279 ccw(c8.877,7.279) 8.877,4.739 202.044,4.739 ccw(c202.044,5.12) 202.425,5.12 202.425,84.528
GND on Bottom Layer "Bottom Layer-GND 1" (solid, pour order 4): 217.297,19.685 ccw(c219.837,19.685) 219.837,17.145 237.871,17.145 cw(c237.871,17.653) 237.363,17.653 237.363,65.024 ccw(c236.601,65.024) 236.601,65.786 217.297,65.786

## Keep-outs
Keep-Out Layer:
  lines w0.254: 196.215,0.127 216.535,0.127 ; 197.993,0.127 184.912,0.127 36.068,0.127 2.654,0.127 cw(c2.654,3.162) 0.508,1.016 cw(c1.734,2.242) 0,2.242 0,87.748 cw(c2.168,87.748) 0.635,89.281 cw(c2.168,87.748) 2.168,89.916 235.712,89.916 cw(c235.712,86.85) 237.88,89.018 cw(c236.369,87.507) 238.506,87.507 238.506,2.908 cw(c235.471,2.908) 237.617,0.762 cw(c236.084,2.295) 236.084,0.127 216.535,0.127 ; 203.708,0.127 203.708,18.796 203.708,86.487 216.408,86.487 216.408,81.153 ; 216.406,81.407 216.535,18.669 216.662,0.434 cw(c216.228,0.434) 216.535,0.127 ; 225.044,1.016 cw(c233.788,5.198) 237.921,13.965 ; 225.298,89.662 ccw(c233.675,85.136) 238.247,76.785

## Silkscreen, mask and mechanical layers (free items; w line width, h text height)
Top Overlay:
  drawing of 92 lines, arcs and shapes, not listed
  text "2026 Temp sense Designed by Mitchell Donahue" at 237.744,51.689 h1 r90
  text "High Voltage" at 164.719,47.244 h1.52 r90
  text "Low Voltage" at 218.821,17.399 h1.52

## Text inside footprints (layer, text, board x,y; h text height)
U6: Top 3D Body "*" at 220.612,40.919 h0 r270; Top Overlay "*" at 201.168,42.964 h0 r270